# Altium PCB PCB_drone_.pcbdoc
Units mm, origin at the board's own origin, x right, y up, seen from the top; angles counter-clockwise.
Board outline 87.88 x 72.82 mm, 2 copper layers (Top Layer, Bottom Layer); 15 components, 13 nets, 88 pads, 20 vias.
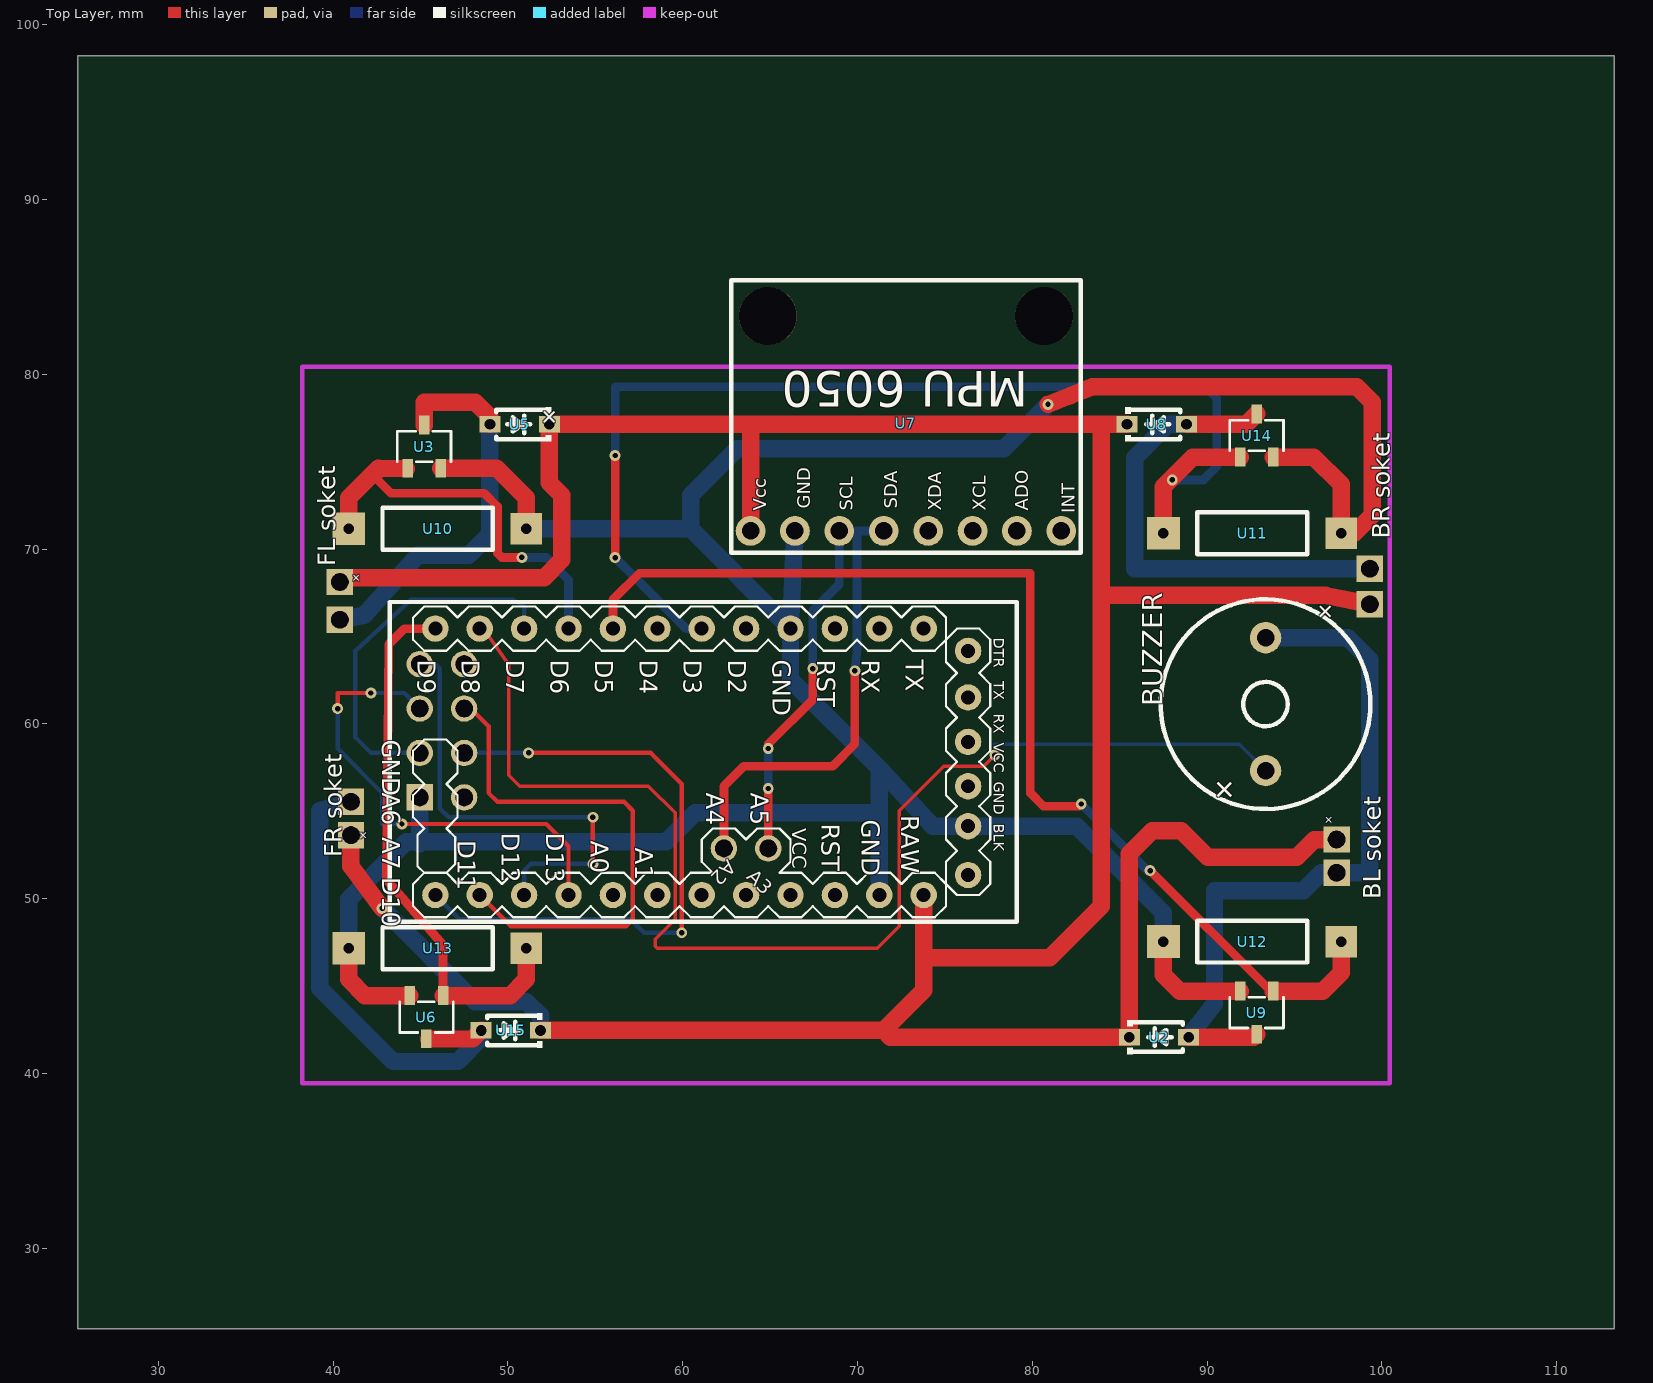
[diagram p0: Top Layer view]
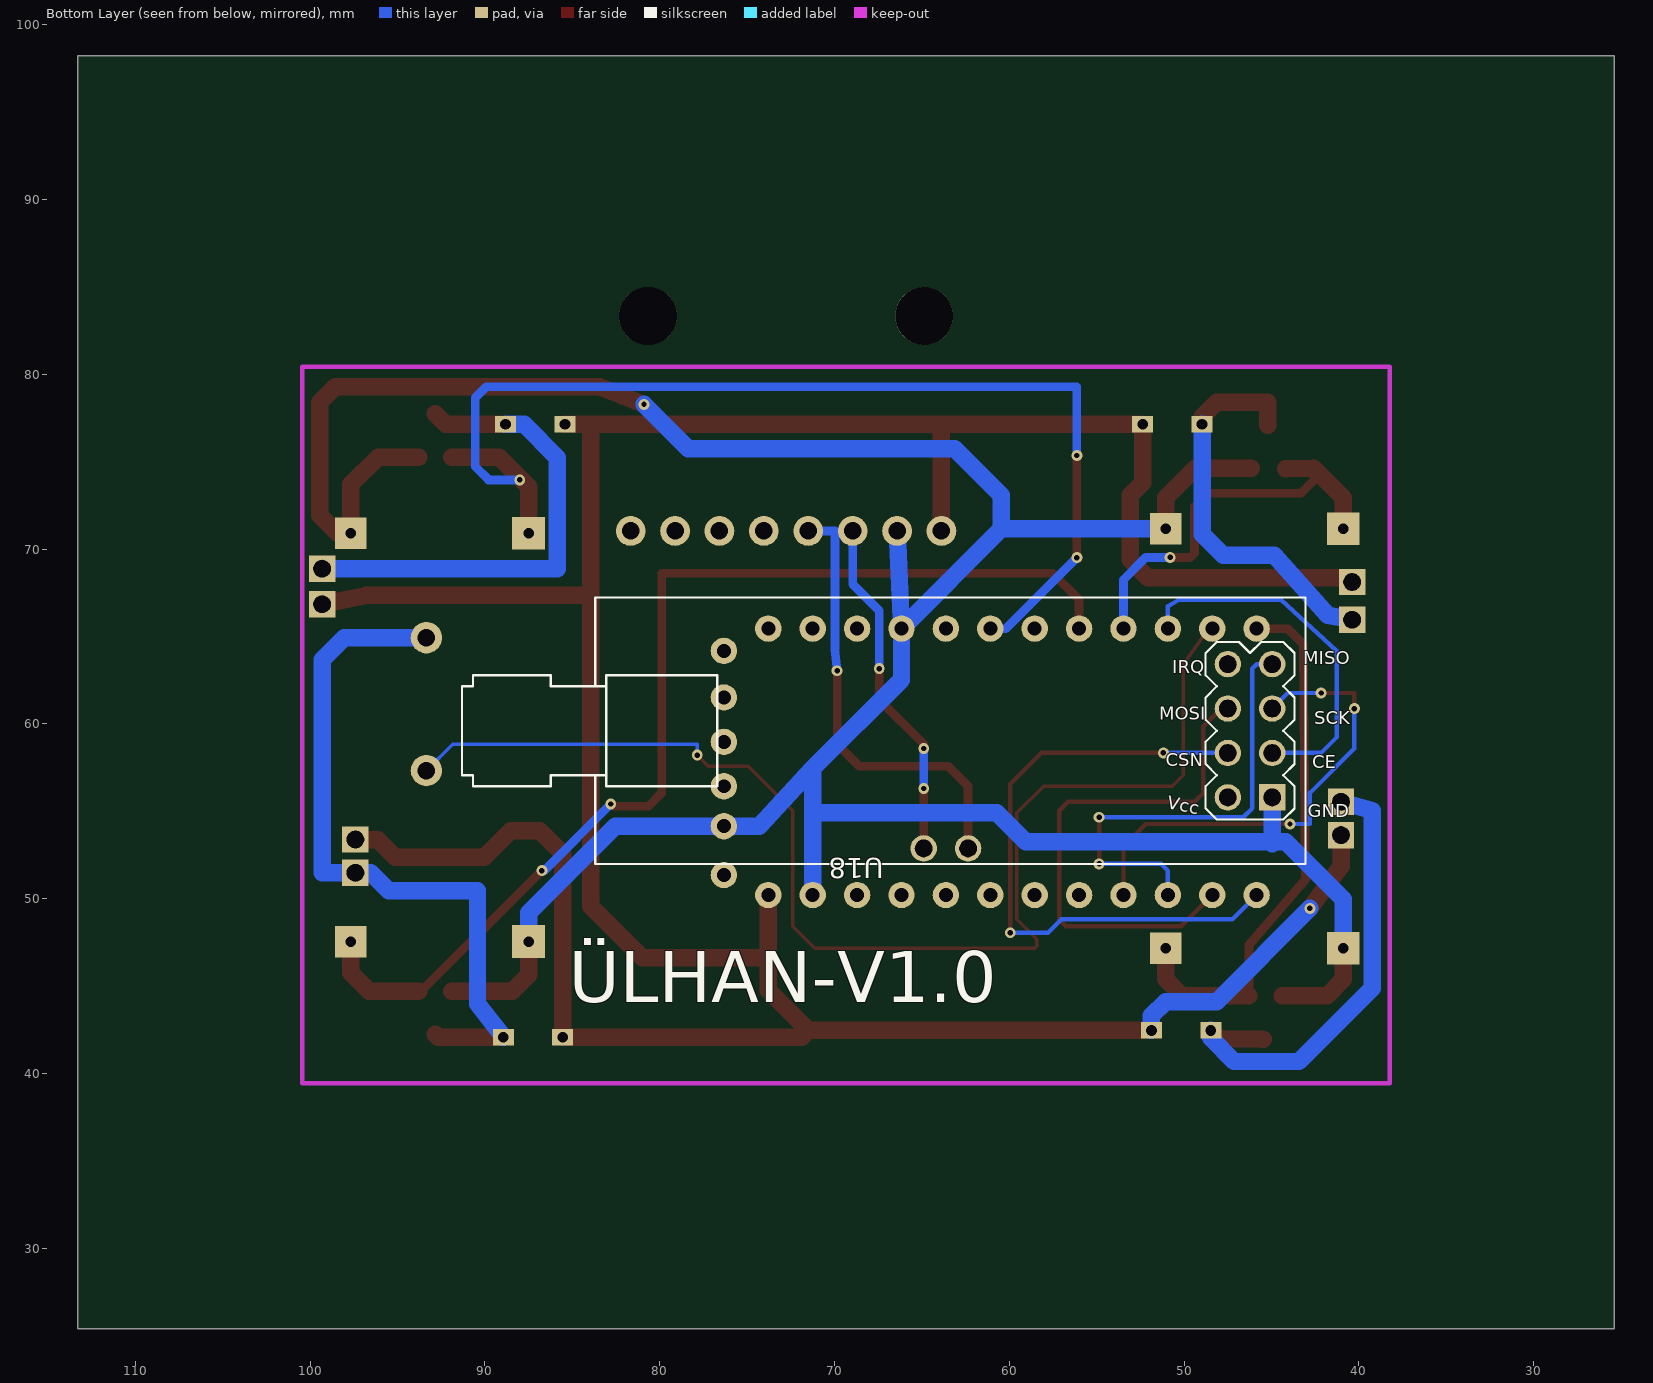
[diagram p1: Bottom Layer view, seen from below]

## Layer stack, top to bottom
Top Layer: signal copper (thickness not stored)
Dielectric: dielectric 0.32, FR-4, Dk 4.8
Bottom Layer: signal copper (thickness not stored)

## Board outline
113.284,25.4 25.4,25.4 25.4,98.217 113.284,98.217

## Components (designator, comment, footprint, x,y, rotation, side; value= is the part's Value field where it differs from the comment)
BUZZER "2.3kHz" BUZ-TH_BD12.0-P7.60-D0.6-FD 93.345,61.134 r90 top
U2 "1N5819W SL" SOD-123_L2.7-W1.6-LS3.7-RD-1 87.249,42.084 r0 top
U3 "SI2300DS-T1-MS" SOT-23-3_L2.9-W1.6-P1.90-LS2.8-BR 45.212,75.866 r270 top
U5 "1N5819W SL" SOD-123_L2.7-W1.6-LS3.7-RD-1 50.673,77.136 r180 top
U6 "SI2300DS-T1-MS" SOT-23-3_L2.9-W1.6-P1.90-LS2.8-BR 45.339,43.227 r90 top
U7 "MPU6050" MPU6050 72.771,71.04 r180 top
U8 "1N5819W SL" SOD-123_L2.7-W1.6-LS3.7-RD-1 87.122,77.136 r0 top
U9 "SI2300DS-T1-MS" SOT-23-3_L2.9-W1.6-P1.90-LS2.8-BR 92.837,43.481 r90 top
U10 "DİRENÇ" DİRENÇ 45.974,71.167 r0 top
U11 "DİRENÇ" DİRENÇ 92.583,70.913 r0 top
U12 "DİRENÇ" DİRENÇ 92.583,47.545 r0 top
U13 "DİRENÇ" DİRENÇ 45.974,47.164 r0 top
U14 "SI2300DS-T1-MS" SOT-23-3_L2.9-W1.6-P1.90-LS2.8-BR 92.837,76.501 r270 top
U15 "1N5819W SL" SOD-123_L2.7-W1.6-LS3.7-RD-1 50.165,42.465 r180 top
U18 "NRF24L01+PA+LNA" NRF24L01+PA+LNA 43.053,51.99 r180 bottom

## Footprints (in the part's own frame and the unit in brackets; to place one, negate y for a bottom-side part, rotate by r counter-clockwise, add the part's x,y. Pads: shape width x height; smd on the part's side, far side on the other; paste and mask are expansions set on the pad)
BUZ-TH_BD12.0-P7.60-D0.6-FD [mm]
  round 1.8 hole 1 paste+0 mask+0.051: 1(-3.8,0) 2(3.8,0)
  silkscreen extent -6,-6 6,6
DİRENÇ [mm]
  rect 1.88x1.88 hole 0.6 paste+0 mask+0.051: 1(-5.08,0)
  rect 1.8x1.8 hole 0.6 paste+0 mask+0.051: 2(5.08,0)
  silkscreen extent -3.15,-1.19 3.15,1.19
MPU6050 [mm]
  round 1.7 hole 1 paste+0 mask+0.05: 1(-8.89,0) 2(-6.35,0) 3(-3.81,0) 4(-1.27,0) 5(1.27,0) 6(3.81,0) 7(6.35,0) 8(8.89,0)
  round 3.3 hole 3.3 unplated paste+0: ""(-7.9,-12.3) ""(7.9,-12.3)
  silkscreen extent -10,-14.35 10,1.25
NRF24L01+PA+LNA [mm]
  rect 1.508x1.508 hole 1 paste+0 mask+0.051: 1(-1.905,3.81)
  round 1.508 hole 1 paste+0 mask+0.051: 2(-4.445,3.81) 3(-1.905,6.35) 4(-4.445,6.35) 5(-1.905,8.89) 6(-4.445,8.89) 7(-1.905,11.43) 8(-4.445,11.43)
  silkscreen extent -48.26,0 0,15.24
SOD-123_L2.7-W1.6-LS3.7-RD-1 [mm]
  rect 1.2x0.95 hole 0.61 paste+0 mask+0.051: 1(-1.7,0) 2(1.7,0)
  silkscreen extent -1.81,-0.98 1.35,0.98
SOT-23-3_L2.9-W1.6-P1.90-LS2.8-BR [mm]
  rect 1.07x0.6 smd paste+0 mask+0.051: 1(1.235,-0.95) 2(1.235,0.95) 3(-1.235,0)
  silkscreen extent -0.88,-1.54 0.88,1.54

## Free pads (board coordinates)
  round 1.508 hole 1 paste+0 mask+0.051: 14(62.357,52.879) 15(64.897,52.879)
  rect 1.508x1.508 hole 1 paste+0 mask+0.051: 16(99.314,68.881) 17(40.386,65.96) 17(40.386,68.119) 17(41.021,53.641) 17(41.021,55.546) 17(97.409,51.482) 17(97.409,53.387) 17(99.314,66.849)
  round 1.508 hole 0.8 paste+0 mask+0.102: A0(56.007,50.212) A1(58.547,50.212) A2(61.087,50.212) A3(63.627,50.212) D2(63.627,65.452) D3(61.087,65.452) D4(58.547,65.452) D5(56.007,65.452) D6(53.467,65.452) D7(50.927,65.452) D8(48.387,65.452) D9(45.847,65.452) D10(45.847,50.212) D11(48.387,50.212) D12(50.927,50.212) D13(53.467,50.212) GND(66.167,65.452) GND@1(71.247,50.212) RAW(73.787,50.212) RST(68.707,50.212) RST@1(68.707,65.452) RX(71.247,65.452) TX(73.787,65.452) TX(76.327,51.355) TX(76.327,54.149) TX(76.327,56.435) TX(76.327,58.975) TX(76.327,61.515) TX(76.327,64.182) VCC(66.167,50.212)

## Via types
v1: diameter 0.62, hole 0.31, Top Layer to Bottom Layer, tented both sides, 20 vias

## Nets (pads, with @x,y where several pads share a name; then routed paths per layer and width w, separated by ;. In a path a pad name is that pad's centre, name@x,y a point inside that pad or via, vN(x,y) a via of type N, cw(c..) or ccw(c..) an arc to the next point about the centre after c; other vN are vias at no path point)
D3: pad.D5 U9.1 U12.2 | length 63.5
  Top Layer w0.5: pad.D5 56.007,67.103 57.531,68.627 79.883,68.627 79.883,56.054 80.645,55.292 82.677,55.292 v1(82.804,55.419) ; v1(86.741,51.609) 93.634,44.716 U9.1
  Top Layer w1: U9.1 96.612,44.716 97.663,45.767 U12.2
  Bottom Layer w0.5: v1(82.804,55.419) 86.614,51.609 v1(86.741,51.609)
D9: pad.D3 U11.1 U14.1 | length 65.6
  Top Layer w0.5: v1(56.134,69.516) v1(56.134,75.358)
  Top Layer w1: U11.1 87.503,73.58 89.189,75.266 U14.1
  Bottom Layer w0.5: v1(56.134,69.516) 60.198,65.452 pad.D3 ; v1(56.134,75.358) 56.134,79.295 89.916,79.295 90.551,78.66 90.551,74.723 89.789,73.961 v1(88.011,73.961)
GND: 
RAW: 
S$2092: pad.D6 U3.1 U10.1 | length 24.1
  Top Layer w0.5: 42.581,74.632 42.581,73.925 43.307,73.199 48.641,73.199 49.403,72.437 49.403,69.77 49.646,69.527 v1(50.8,69.527)
  Top Layer w1: U10.1 40.894,72.945 42.581,74.632 U3.1@44.196,74.596
  Bottom Layer w0.5: v1(50.8,69.527) 52.186,69.527 53.467,68.246 pad.D6
S$5087: pad.D9 U6.1 U13.2 | length 31.3
  Top Layer w0.5: pad.D9 44.069,65.452 43.18,64.563 43.053,51.101 46.289,47.357 U6.1
  Top Layer w1: U6.1 50.13,44.462 51.054,45.386 U13.2
S$6686: pad.D7 U18.3 | length 21.2
  Bottom Layer w0.254: U18.3 42.164,58.34 41.275,59.229 41.275,64.182 44.45,67.103 50.292,67.103 50.927,66.722 pad.D7
S$6782: pad.D13 U18.5 | length 27.6
  Top Layer w0.254: v1(40.259,60.88) 40.259,61.769 v1(42.164,61.769) ; v1(43.942,54.276) 52.197,54.276 53.467,53.006 pad.D13
  Bottom Layer w0.254: v1(40.259,60.88) 40.259,58.594 42.799,56.054 42.799,54.276 v1(43.942,54.276) ; v1(42.164,61.769) 44.069,61.769 U18.5
S$6789: pad.D12 U18.7 | length 26.4
  Top Layer w0.254: v1(54.864,51.99) v1(54.864,54.657)
  Bottom Layer w0.254: U18.7 45.847,63.42 46.101,63.166 46.101,55.165 46.609,54.657 v1(54.864,54.657) ; pad.D12 50.927,51.609 51.308,51.99 v1(54.864,51.99)
S$6896: pad.D11 U18.6 | length 30.2
  Top Layer w0.254: U18.6 47.879,60.88 48.895,59.864 48.895,56.054 49.403,55.546 56.642,55.546 57.15,55.038 57.15,48.815 56.769,48.434 50.165,48.434 pad.D11
S$6976: pad.D10 U18.4 | length 36.7
  Top Layer w0.254: v1(51.181,58.34) 58.166,58.34 59.944,56.562 v1(59.944,48.053)
  Bottom Layer w0.254: pad.D10 47.244,48.815 57.023,48.815 57.785,48.053 v1(59.944,48.053) ; U18.4 v1(51.181,58.34)
S$7287: BUZZER.2 pad.14 pad.15 pad.16 pad.17 pad.GND pad.GND@1 pad.RAW pad.TX@76.327,54.149 U2.1 U2.2 U3.2 U3.3 U5.1 U5.2 U6.2 U6.3 U7.5 U7.6 U7.7 U7.8 U8.1 U8.2 U9.2 U9.3 U10.2 U11.2 U12.1 U13.1 U14.2 U14.3 U15.1 U15.2 U18.1 | length 543.4
  Top Layer w0.5: pad.14 62.357,56.435 63.5,57.578 68.58,57.578 69.85,58.848 v1(69.85,63.039) ; pad.15 v1(64.897,56.308) ; v1(64.897,58.594) 64.897,58.848 67.437,61.388 v1(67.437,63.166)
  Top Layer w1: pad.17@40.386,68.119 40.64,68.373 52.07,68.373 53.086,69.389 53.086,73.072 52.373,73.785 U5.1 55.88,77.136 U8.1 ; U13.1 40.894,45.386 41.818,44.462 U6.2 ; pad.17@41.021,53.641 41.021,51.863 v1(42.799,49.45) ; U3.3@45.212,77.1 45.212,78.406 48.133,78.406 48.974,77.565 U5.2 ; U6.3@45.466,41.957 47.992,41.992 U15.2 ; U3.2 49.368,74.631 51.054,72.945 U10.2 ; U15.1 57.404,42.465 71.501,42.465 ; U7.8 63.881,77.136 ; 73.787,46.618 80.988,46.618 83.947,49.577 83.947,77.136 U8.1 ; pad.RAW 73.787,44.751 71.501,42.465 ; v1(80.899,78.279) 82.169,78.787 83.439,79.295 91.694,79.295 ; 83.947,67.357 96.774,67.357 pad.17@99.314,66.849 ; U12.1 87.503,45.64 88.427,44.716 U9.2 ; U8.2 92.237,77.136 U14.3 ; U2.2 92.675,42.084 U9.3 ; 91.44,79.295 98.552,79.295 99.441,78.406 99.441,71.929 98.425,70.913 U11.2 97.663,73.707 96.103,75.267 U14.2 ; pad.17@97.409,53.387 96.139,53.387 95.123,52.371 90.043,52.371 88.519,53.895 86.868,53.895 85.549,52.576 U2.1 71.882,42.084 71.501,42.465
  Bottom Layer w0.5: v1(64.897,56.308) v1(64.897,58.594) ; v1(67.437,63.166) 67.437,66.468 68.961,67.992 U7.6 ; v1(69.85,63.039) 69.977,64.266 69.977,71.04 U7.5
  Bottom Layer w1: pad.17@40.386,65.96 41.783,66.214 44.831,69.643 47.752,69.643 48.971,70.862 U5.2@48.971,77.136 ; U13.1 40.894,49.958 44.196,53.26 59.055,53.26 60.706,54.911 69.225,54.911 71.247,54.911 ; pad.17@41.021,55.546 39.243,55.038 39.243,44.878 43.434,40.687 47.117,40.687 48.466,42.036 U15.2 ; v1(42.799,49.45) 48.133,44.116 51.054,44.116 51.865,43.305 U15.1 ; 44.958,53.133 U18.1 ; U10.2 60.452,71.167 ; U7.7 pad.GND ; 71.247,50.212 71.247,57.451 ; v1(80.899,78.279) 78.359,75.739 63.119,75.739 60.452,73.072 60.452,71.167 ; U12.1 87.503,49.196 82.55,54.149 76.327,54.149 74.295,54.149 71.247,57.451 ; U8.2 87.757,77.136 85.852,75.231 85.852,68.881 pad.16 ; U2.2 90.424,43.989 90.424,50.466 95.504,50.466 96.52,51.482 97.409,51.482 99.314,51.482 99.314,63.674 98.054,64.934 BUZZER.2@93.345,64.934 ; 60.452,71.167 pad.GND ; pad.GND 66.167,62.531 71.247,57.451
S$7294: BUZZER.1 pad.D8 | length 72.2
  Top Layer w0.2: pad.D8 48.768,65.198 50.038,63.42 50.038,57.07 50.673,56.435 58.039,56.435 59.563,54.911 59.563,48.815 58.42,47.672 58.42,47.291 58.547,47.164 71.12,47.164 72.39,48.434 72.39,55.038 74.93,57.578 77.216,57.578 v1(77.851,58.213)
  Bottom Layer w0.2: v1(77.851,58.213) 77.851,58.848 91.831,58.848 BUZZER.1
pads on no net: U7. U7.1 U7.2 U7.3 U7.4 U18.2 U18.8

## Silkscreen, mask and mechanical layers (free items; w line width, h text height)
Top Overlay:
  drawing of 214 lines, arcs and shapes, not listed
  text "+" at 52.478,78.252 h1 r225
  text "GND" at 67.31,72.31 h0.76 r90
  text "SDA" at 72.263,72.31 h0.76 r90
  text "Vcc" at 64.77,72.183 h0.76 r90
  text "SCL" at 69.723,72.183 h0.76 r90
  text "XDA" at 74.803,72.183 h0.76 r90
  text "XCL" at 77.343,72.183 h0.76 r90
  text "ADO" at 79.756,72.183 h0.76 r90
  text "INT" at 82.423,72.056 h0.76 r90
  text "BR soket" at 100.449,70.607 h1 r90
  text "FL soket" at 40.124,69.008 h1 r90
  text "+" at 41.706,68.296 h0.5 r135
  text "+" at 96.887,67.135 h1 r225
  text "DTR   TX   RX  VCC  GND  BLK" at 77.8,64.944 h0.61 r270
  text "D9" at 44.831,63.674 h1.02 r270
  text "D8" at 47.371,63.674 h1.02 r270
  text "D7" at 49.911,63.674 h1.02 r270
  text "D6" at 52.451,63.674 h1.02 r270
  text "D5" at 54.991,63.674 h1.02 r270
  text "D4" at 57.531,63.674 h1.02 r270
  text "D3" at 60.071,63.674 h1.02 r270
  text "D2" at 62.611,63.674 h1.02 r270
  text "GND" at 65.151,63.674 h1.02 r270
  text "RST" at 67.691,63.674 h1.02 r270
  text "RX" at 70.231,63.674 h1.02 r270
  text "TX" at 72.771,63.674 h1.02 r270
  text "GND" at 42.799,59.102 h1.02 r270
  text "A6" at 42.799,56.054 h1.02 r270
  text "A4" at 61.341,56.054 h1.02 r270
  text "A5" at 63.881,56.054 h1.02 r270
  text "RAW" at 72.517,54.784 h1.02 r270
  text "GND" at 70.231,54.53 h1.02 r270
  text "+" at 97.332,54.453 h0.5 r135
  text "RST" at 67.945,54.276 h1.02 r270
  text "VCC" at 66.269,54.022 h0.81 r270
  text "D12" at 49.657,53.768 h1.02 r270
  text "D13" at 52.197,53.768 h1.02 r270
  text "+" at 42.087,53.564 h0.5 r135
  text "A7" at 42.799,53.514 h1.02 r270
  text "D11" at 47.117,53.351 h1.02 r270
  text "A0" at 54.737,53.323 h1.02 r270
  text "A1" at 57.277,52.909 h1.02 r270
  text "FR soket" at 40.505,52.371 h1 r90
  text "A2" at 62.578,52.277 h0.81 r225
  text "D10" at 42.799,51.228 h1.02 r270
  text "A3" at 63.594,51.195 h0.81 r315
  text "BL soket" at 99.941,49.958 h1 r90
Bottom Overlay:
  text "MISO" at 43.18,63.42 h0.76
  text "IRQ" at 50.673,62.912 h0.76
  text "MOSI" at 51.435,60.245 h0.76
  text "SCK" at 42.545,59.991 h0.76
  text "CSN" at 51.054,57.578 h0.76
  text "CE" at 42.672,57.451 h0.76
  text "Vcc" at 51.006,55.173 h0.76 r12
  text "GND" at 42.926,54.657 h0.76
  text "ÜLHAN-V1.0" at 85.217,43.1 h5

## Text inside footprints (layer, text, board x,y; h text height)
BUZZER: Top Overlay "+" at 91.131,57.138 h1.27 r225
U7: Top Overlay "MPU 6050" at 79.756,80.184 h2.03 r180